# Altium PCB PCB.PcbDoc (part 1 of 2)
Units mm, origin at the board's own origin, x right, y up, seen from the top; angles counter-clockwise.
Board outline 27 x 40 mm, 2 copper layers (Top Layer, Bottom Layer), stack 1.56 mm thick; 47 components, 32 nets, 150 pads, 52 vias.
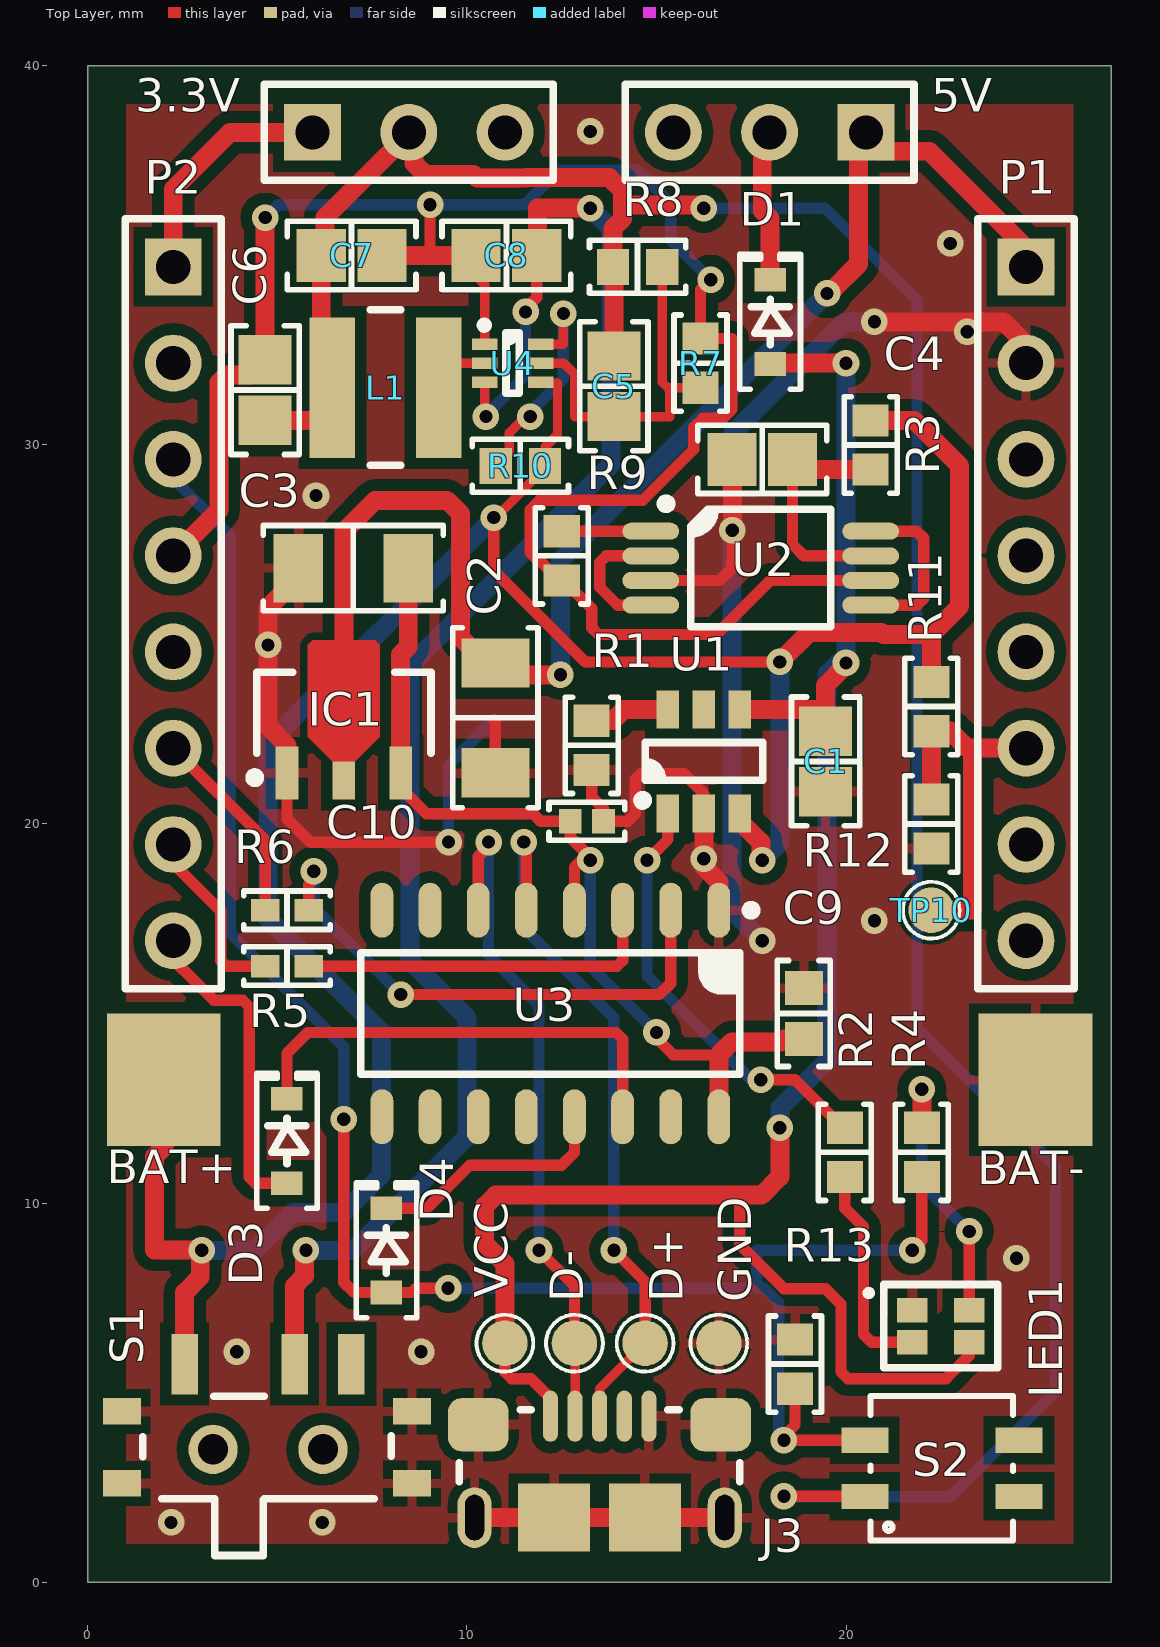
[diagram p0: Top Layer view]
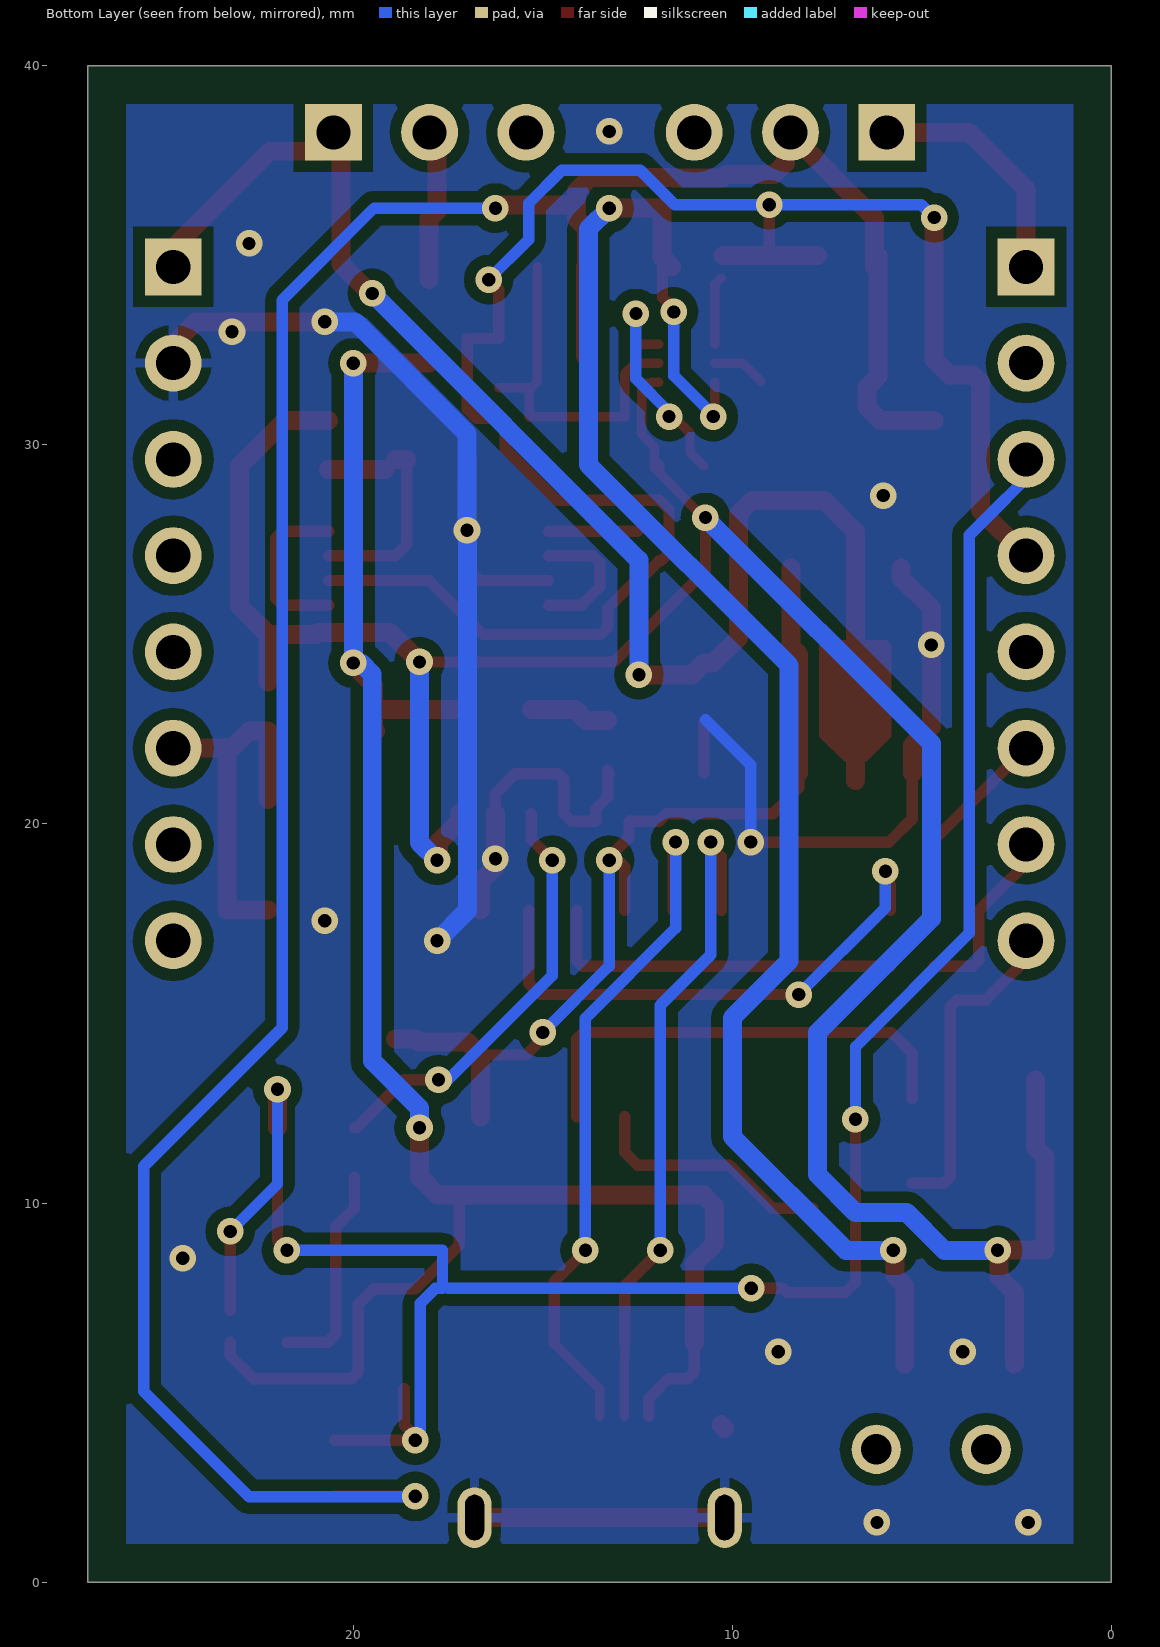
[diagram p1: Bottom Layer view, seen from below]

## Layer stack, top to bottom
Top Solder: solder mask 0.02, Solder Resist, Dk 3.5
Top Layer: signal copper 0.03
Dielectric 1: dielectric 1.5, FR-4, Dk 4.8
Bottom Layer: signal copper 0.03
Bottom Solder: solder mask 0.02, Solder Resist, Dk 3.5

## Board outline
0,0 27,0 27,40 0,40

## Design rules (kind name [scope] priority, off if disabled: settings)
AcuteAngle [All] p1: minimum=6.00000000000000E+0001 checktracksonly=TRUE
AssemblyTestPointUsage [(not InNetClass('NOTESTPOINTS'))] p1: allowmultiple=TRUE
AssemblyTestPointUsage AssemblyTestPointUsageN [InNetClass('NOTESTPOINTS')] p2: valid=2 allowmultiple=TRUE
AssemblyTestpoint [All] p1: testpointundercomponent=TRUE minsize=0.8 maxsize=2 preferedsize=1 minholesize=0 maxholesize=0.35 preferedholesize=0 testpointgrid=1.27 usegrid=FALSE gridoriginx=87.5 gridoriginy=62.5 gridtolerance=0 allowsidetop=TRUE minspacing=2.54 // Zollner
BoardOutlineClearance BoardCopperOutlineClearance [(OnLayer('Top Layer') OR OnLayer('Bottom Layer') )] p1: gap=0.5 ignorepadtopadclearanceinfootprint=FALSE except(1: Poly-OutlineEdge Region-OutlineEdge; 1.5: SMDPad-OutlineEdge THPad-OutlineEdge)
Clearance PadToViaClearance [IsVia and not IsComponentVia vs IsPad] p1: gap=0.025 ignorepadtopadclearanceinfootprint=TRUE
Clearance "Clearance NOTSELV-SELV" [InNetClass('NOTSELV') vs NOT InNetClass('NOTSELV')] p2: gap=6 ignorepadtopadclearanceinfootprint=FALSE // according to previous calio PCB
Clearance "Clearance (FAB)" [All] p3: gap=0.203 ignorepadtopadclearanceinfootprint=TRUE except(0.305: Arc-Poly Track-Poly SMDPad-Poly THPad-Poly Via-Poly Fill-Poly Poly-Poly)
ComponentClearance ComponentClearance_NetTie [((ObjectKind = 'Component') And (ComponentType = 'Net Tie')) Or (Footprint = 'StarPoint') Or (Footprint like 'NetTieVia*')] p1: gap=-3.81 collisioncheckmode=3 verticalgap=-3.81 showdistances=FALSE
ComponentClearance [All] p2: gap=0.254 collisioncheckmode=3 verticalgap=0.254 showdistances=FALSE
DiffPairsRouting [All] p1: maxlimit=1.27 minlimit=0.203 mostfreqgap=0.203 toplayer_minwidth=0.152 toplayer_maxwidth=2.54 toplayer_prefwidth=0.254 bottomlayer_minwidth=0.152 bottomlayer_maxwidth=2.54 bottomlayer_prefwidth=0.254 maxuncoupledlength=12.7
FabricationTestPointUsage [All] p1: valid=2 allowmultiple=FALSE
FabricationTestpoint [All] p1: side=3 testpointundercomponent=TRUE minsize=1.016 maxsize=2.54 preferedsize=1.524 minholesize=0 maxholesize=1.016 preferedholesize=0.813 testpointgrid=0.025 allowsidetop=TRUE allowsidebottom=TRUE usegrid=FALSE gridtolerance=0
HoleSize [All] p1: absolutevalues=TRUE maxlimit=6.35 minlimit=0.3 maxpercent=80.000 minpercent=20.000 // Zollner
HoleToHoleClearance HoleToHoleClearance_NetTieVia [InPadClass('NetTieVias') vs InPadClass('NetTieVias')] p1: gap=0 allowstackedmicrovias=TRUE
HoleToHoleClearance [All] p2: gap=0.25 allowstackedmicrovias=TRUE // Zollner
MinimumAnnularRing [All] p1: minimumring=0.15 // PCBWAY
MinimumSolderMaskSliver [All] p1: minsoldermaskwidth=0.2 // Zollner
PlaneClearance PlaneClearance_1 [All] p1: clearance=0.508
PlaneConnect [All] p1: pad.planeconnectstyle=Relief pad.reliefexpansion=0.508 pad.reliefentries=4 pad.reliefconductorwidth=0.254 pad.reliefairgap=0.254 via.planeconnectstyle=Direct via.reliefexpansion=0.508 via.reliefentries=4 via.reliefconductorwidth=0.254 via.reliefairgap=0.254
PolygonConnect [All] p1: thpad.connectstyle=Relief thpad.reliefconductorwidth=0.254 thpad.reliefentries=4 thpad.polygonreliefangle="90 Angle" thpad.airgapwidth=0.254 smdpad.connectstyle=Relief smdpad.reliefconductorwidth=0.254 smdpad.reliefentries=4 smdpad.polygonreliefangle="90 Angle" smdpad.airgapwidth=0.254 via.connectstyle=Direct via.reliefconductorwidth=0.254 via.reliefentries=4 via.polygonreliefangle="90 Angle" via.airgapwidth=0.254
RoutingVias [All] p1: holewidth=0.35 width=0.7 viastyle="Through Hole" minholewidth=0.3 minwidth=0.6 maxholewidth=1.27 maxwidth=1.27
SMDEntry [not IsTestpoint] p1: side=TRUE corner=TRUE anyangle=FALSE
SMDNeckDown [not IsTestpoint] p1: percent=90.000
SMDToCorner [All] p1: distance=10000
SMDToPlane [All] p1: distance=0
ShortCircuit [All vs not IsBoardCutoutRegion] p1: allowed=FALSE
SilkToSolderMaskClearance [IsPad] p1: minsilkscreentomaskgap=0.127 clearancetoexposedcopper=TRUE
SolderMaskExpansion [All] p1: expansion=0.05 // Zollner
SolderMaskExpansion SolderMaskExpansionToHoles [All] p2: expansion=0.1 soldermaskfromhole=TRUE // Zollner
UnRoutedNet [All] p1: checkbadconnections=TRUE
Width [All] p1: maxlimit=12.7 minlimit=0.203 preferedwidth=0.254
16 further rules are at their usual default settings.

## Classes and differential pairs
component class main: BAT+ BAT- C1 C2 C3 C4 C5 C6 C7 C8 C9 C10 D1 D3 D4 D+ D- GND IC1 J3 L1 P1 P2 R1 R2 R3 R4 R5 R6 R7 R8 R9 R10 R11 R12 S1 S2 U1 U2 U3 U4 VCC

## Components (designator, comment, footprint, x,y, rotation, side; value= is the part's Value field where it differs from the comment)
3.3V "Header 3" HDR1X3 5.925,38.25 r0 top (schematic designator P3)
5V "Header 3" HDR1X3 20.525,38.25 r180 top (schematic designator P4)
BAT+ "3MMx3.5MM" PAD_WITHOUT_HOLE_3X3.5MM 2,13.25 r0 top
BAT- "3MMx3.5MM" PAD_WITHOUT_HOLE_3X3.5MM 25,13.25 r0 top
C1 "2.2 µF" "CAP 0805_2012" 19.46,21.65 r90 top
C2 "10 µF" "CAP 1206_3216 - 0.8MM" 10.75,22.8 r90 top
C3 "10 µF" "CAP 1206_3216 - 0.8MM" 7,26.75 r0 top
C4 "0.1 µF" "CAP 0805_2012" 17.79,29.62 r0 top
C5 "120 pF" "CAP 0805_2012" 13.878,31.55 r90 top
C6 "22 µF" "CAP 0805_2012" 4.675,31.45 r270 top
C7 "22 µF" "CAP 0805_2012" 6.955,35 r180 top
C8 "4.7 µF" "CAP 0805_2012" 11.04,35 r0 top
C9 "0.1 µF" "CAP 0603_1608" 18.888,15 r270 top
C10 "120pF" "CAP 0402_1005" 13.164,20.075 r180 top
D1 "1N4148WS-HG3-08" SOD323 18,33.25 r90 top
D3 "1N4148WS-HG3-08" SOD323 5.25,11.638 r90 top
D4 "1N4148WS-HG3-08" SOD323 7.875,8.75 r90 top
D+ "Test point" TEST_POINT 14.7,6.3 r90 top
D- "Test point" TEST_POINT 12.835,6.3 r90 top
GND "Test point" TEST_POINT 16.645,6.3 r90 top
IC1 "Diodes Inc PJ6206A" "ON SEMI SOT-89 H" 6.75,22.75 r90 top
J3 "10118193-0001LF" "FCI USB 10118193-0001LF" 13.5,1.75 r180 top locked
L1 "15 µH" "TAIYO YUDEN NR4018" 7.85,31.514 r180 top
LED1 "Bicolor 1615" "LED 0603 1615 BICOLOR" 22.5,6.75 r0 top
P1 "Header 8" HDR1X8 24.75,34.7 r270 top locked
P2 "Header 8" HDR1X8 2.25,34.7 r270 top locked
R1 "3.9 kOhms" "RES 0603_1608" 13.29,22.075 r90 top
R2 "330 Ohms" "RES 0603_1608" 19.968,11.337 r270 top
R3 "RC1608F101CS" "RES 0603_1608" 20.65,30 r90 top
R4 "330 Ohms" "RES 0603_1608" 22,11.337 r270 top
R5 "RC1005J000CS" "RES 0402_1005" 5.25,16.25 r180 top
R6 "RC1005J000CS" "RES 0402_1005" 5.25,17.725 r180 top
R7 "100 kOhms" "RES 0603_1608" 16.162,32.16 r270 top
R8 "453 kOhms" "RES 0603_1608" 14.5,34.7 r180 top
R9 "RC1608F102CS" "RES 0603_1608" 12.5,27.075 r90 top
R10 "499 kOhms" "RES 0603_1608" 11.408,29.45 r180 top
R11 "100 kOhms" "RES 0603_1608" 22.25,23.1 r90 top
R12 "10 kOhms" "RES 0603_1608" 22.25,20 r90 top
R13 "5 kOhms" "RES 0603_1608" 18.655,5.75 r270 top
S1 "Mini Slide Switch" "MINI SLIDE SWITCH" 4.75,3.5 r180 top
S2 "EVQ-P7A01P" EVQ-P7A01P 22.529,3 r0 top
TP10 "Test point" TEST_POINT 22.25,17.725 r90 top
U1 "TP4057" "TI SOT-23-6 DDC" 16.25,21.65 r90 top
U2 "DW03D" "TI MSOP-8 DGS" 17.75,26.75 r0 top
U3 "CH340G" "TI SOP-16 D" 12.2,15 r270 top
U4 "TPS62A01ADRLR" "TI SOT-563 DRL" 11.205,32.16 r0 top
VCC "Test point" TEST_POINT 11,6.3 r0 top

## Footprints (in the part's own frame and the unit in brackets; to place one, negate y for a bottom-side part, rotate by r counter-clockwise, add the part's x,y. Pads: shape width x height; smd on the part's side, far side on the other; paste and mask are expansions set on the pad)
"CAP 0402_1005" [mm] "Chip Capacitor, 2-Leads, Body 1.02x0.51mm, IPC Medium Density"
  rect 0.6x0.64 smd: 1(-0.44,0) 2(0.44,0)
  silkscreen extent -1,-0.5 1,0.5, body extent -0.5,-0.26 0.5,0.26, height 0.52
"CAP 0603_1608" [mm] "Chip Capacitor, 2-Leads, Body 1.60x0.80mm, IPC Medium Density"
  rect 0.9x1 smd: 1(-0.675,0) 2(0.675,0)
  silkscreen extent -1.4,-0.7 1.4,0.7, body extent -0.8,-0.41 0.8,0.41, height 0.82
"CAP 0805_2012" [mm] "Chip Capacitor, 2-Leads, Body 2.00x1.20mm, IPC Medium Density"
  rect 1.3x1.4 smd: 1(-0.8,0) 2(0.8,0)
  silkscreen extent -1.7,-0.9 1.7,0.9, body extent -1,-0.64 1,0.64, height 1.26
"CAP 1206_3216 - 0.8MM" [mm] "Chip Capacitor, 2-Leads, Body 3.25x1.60mm, IPC Medium Density"
  rect 1.3x1.8 smd: 1(-1.45,0) 2(1.45,0)
  silkscreen extent -2.37,-1.12 2.37,1.12, body extent -1.6,-0.8 1.6,0.8, height 0.8
EVQ-P7A01P [mil]
  rect 49x26 smd paste+0 mask+0: 2(-80,29.13) 2*(80,29.13) 3(-80,-29.13) 3*(80,-29.13)
  silkscreen extent -74,-75 74,75, body extent -93,-83 92,57, height 53
"FCI USB 10118193-0001LF" [mm] "USB 2.0 Type B Micro"
  oval 0.4x1.35 smd: 1(1.3,-2.625) 2(0.65,-2.625) 3(0,-2.625) 4(-0.65,-2.625) 5(-1.3,-2.625)
  oval 0.9x1.6 hole 0.5 slot 1.2 at 90 deg: S(-3.3,0.05) S(3.3,0.05)
  rrect50% 1.6x1.4 smd: S(-3.2,-2.4) S(3.2,-2.4)
  rect 1.9x1.8 smd: S(-1.2,0.05) S(1.2,0.05)
  silkscreen extent -3.7,-2.8 3.7,-0.9, body extent -3.93,-2.9 3.93,2.76, height 2.78
HDR1X3 [mm] "Connector; Header; 3 Position"
  rect 1.5x1.5 hole 0.9: 1(0,0)
  round 1.5 hole 0.9: 2(2.54,0) 3(5.08,0)
  silkscreen extent -1.27,-1.27 6.35,1.27
HDR1X8 [mm] "Connector; Header; 8 Position"
  rect 1.5x1.5 hole 0.9: 1(0,0)
  round 1.5 hole 0.9: 2(2.54,0) 3(5.08,0) 4(7.62,0) 5(10.16,0) 6(12.7,0) 7(15.24,0) 8(17.78,0)
  silkscreen extent -1.27,-1.27 19.05,1.27
"LED 0603 1615 BICOLOR" [mm] "SMD SMT Light Emitting Diode 1.6*0.8*0.6MM"
  rect 0.8x0.65 smd mask+0.05: 1(-0.75,0.425) 2(0.75,0.425) 3(-0.75,-0.425) 4(0.75,-0.425)
  silkscreen extent -1.94,-1.1 1.5,1.1
"MINI SLIDE SWITCH" [mm] "Miniature Horizontal Slide Switch SMD"
  rect 0.7x1.6 smd: 1(2.2,-2.25) 2(-0.7,-2.25) 3(-2.2,-2.25)
  rect 1x0.7 smd: 4(-3.8,-1) 4(-3.8,0.9) 4(3.85,-1) 4(3.85,0.9)
  round 1.3 hole 0.8: MH(-1.45,0) MH(1.45,0)
  silkscreen extent -3.25,-1.4 3.3,2.8, body extent -3.25,-1.4 6.5,2.8, height 1.4
"ON SEMI SOT-89 H" [mm] "SOT89, 3-Leads, Body 4.50x2.50mm, Pitch 1.50mm, Lead Span 3.3mm, IPC Medium Density"
  rect 1.4x0.6 smd: 1(-1.4,1.5) 3(-1.4,-1.5)
  rect 1x0.6 smd: 2(-1.6,0)
  Top Layer region: -1.1,0.3 -0.45,0.95 1.975,0.95 2.1,0.825 2.1,-0.825 1.975,-0.95 -0.45,-0.95 -1.1,-0.3
  silkscreen extent -1.65,-2.3 1.25,2.47, body extent -2.05,-2.25 2.1,2.25, height 1.5
PAD_WITHOUT_HOLE_3X3.5MM [mm]
  rect 3x3.5 smd: 1(0,0)
"RES 0402_1005" [mm] "Chip Resistor, 2-Leads, Body 1.0x0.5mm, IPC Medium Density"
  rect 0.75x0.6 smd: 1(-0.575,0) 2(0.575,0)
  silkscreen extent -1.14,-0.51 1.14,0.51, body extent -0.5,-0.25 0.5,0.25, height 0.35
"RES 0603_1608" [mm] "Chip Resistor, 2-Leads, Body 1.60x0.80mm, IPC Medium Density"
  rect 0.85x0.95 smd: 1(-0.65,0) 2(0.65,0)
  silkscreen extent -1.27,-0.7 1.27,0.7, body extent -0.8,-0.4 0.8,0.4, height 0.45
SOD323 [mm] "SOD, 2-Leads, Body 1.25x2.50mm, IPC Medium Density"
  rect 0.625x0.83 smd: 1(-1.112,0) 2(1.112,0)
  silkscreen extent -1.78,-0.8 1.78,0.8, body extent -1.36,-0.62 1.36,0.62, height 1.05
"TAIYO YUDEN NR4018" [mm] "Power Inductor, 2-Leads,Taiyo Yuden, NR4018T100M"
  rect 1.2x3.7 smd: 1(-1.4,0) 2(1.4,0)
  silkscreen extent -0.4,-2.05 0.4,2.05, body extent -2.05,-2.05 2.05,2.05, height 1.8
TEST_POINT [mm] "Reference point"
  round 1.2 smd paste-0.6: TP?(0,0)
  silkscreen extent -0.75,-0.75 0.75,0.75, body extent -0.6,-0.6 0.6,0.6, height 0.03
"TI MSOP-8 DGS" [mm] "MSOP, 8-Leads, Body 3.00x4.40mm, Pitch 0.65mm, IPC Medium Density"
  oval 1.5x0.45 smd: 1(-2.9,0.975) 2(-2.9,0.325) 3(-2.9,-0.325) 4(-2.9,-0.975) 5(2.9,-0.975) 6(2.9,-0.325) 7(2.9,0.325) 8(2.9,0.975)
  silkscreen extent -2.62,-1.55 1.85,1.82, body extent -3.2,-1.55 3.2,1.55, height 1.2
"TI SOP-16 D" [mm] "SOP, 16-Leads, Body 9.90x3.90mm, Pitch 1.27mm, IPC Medium Density"
  oval 1.45x0.6 smd: 1(-2.725,4.445) 2(-2.725,3.175) 3(-2.725,1.905) 4(-2.725,0.635) 5(-2.725,-0.635) 6(-2.725,-1.905) 7(-2.725,-3.175) 8(-2.725,-4.445) 9(2.725,-4.445) 10(2.725,-3.175) 11(2.725,-1.905) 12(2.725,-0.635) 13(2.725,0.635) 14(2.725,1.905) 15(2.725,3.175) 16(2.725,4.445)
  silkscreen extent -2.85,-5 1.6,5.42, body extent -3,-5 3,5, height 1.75
"TI SOT-23-6 DDC" [mm] "SOT23, 6-Leads, Body 2.90x2.80mm, Pitch 0.95mm, IPC Medium Density"
  rect 1x0.6 smd: 1(-1.375,0.95) 2(-1.375,0) 3(-1.375,-0.95) 4(1.375,-0.95) 5(1.375,0) 6(1.375,0.95)
  silkscreen extent -1.15,-1.55 0.5,1.74, body extent -1.19,-1.45 1.19,1.45, height 1
"TI SOT-563 DRL" [mm] "SOT DRL, 6-Leads, Body 1.10x1.60mm, Pitch 0.5mm, IPC Medium Density"
  rect 0.67x0.3 smd mask+0.07: 1(-0.74,0.5) 2(-0.74,0) 3(-0.74,-0.5) 4(0.74,-0.5) 5(0.74,0) 6(0.74,0.5)
  silkscreen extent -0.85,-0.8 0.18,1.1, body extent -0.8,-0.8 0.8,0.8, height 0.6

## Part data
3.3V 5V: "Header, 3-Pin", LatestRevisionDate=17-Jul-2002, LatestRevisionNote="Re-released for DXP Platform.", Publisher="Altium Limited"
BAT+ BAT-: library part PAD_WITHOUT_HOLE_3X3.5MM, "High: 3mm Length: 3.5mm"
C1: library part CL21B225KAFNNNG, "CAP CER 2.2UF 25V X7R 0805", Device Package="0805 (2012 Metric)", manufacturer="Samsung Electro-Mechanics", Operating Temperature="-55°C ~ 125°C", Supplier Part Number 1=CL21B225KAFNNNG-ND, Temperature Coefficient=X7R, Tolerance=±10%, Voltage - Rated=25V, Applications="General Purpose", Capacitance="2.2 µF", componentlink1description=Datasheet, componentlink1url=https://www.samsungsem.com/kr/support/product-search/mlcc/CL21B225KAFNNNG.jsp, componentlink2description="DigiKey Link", componentlink2url=https://www.digikey.com/en/products/detail/samsung-electro-mechanics/CL21B225KAFNNNG/3894505, id=7786, lastupdated=2023-01-24T21:37:16.427, Lifecycle Status=Active, Minimum Order=3000, Mounting Type="Surface Mount, MLCC", Package / Case="0805 (2012 Metric)", packaging=TapeAndReel, partid=47423, Part Number=CL21B225KAFNNNG, Part Status=Active, price=0.02, series=CL, Size / Dimension="0.079\" L x 0.049\" W (2.00mm x 1.25mm)", Supplier 1=DigiKey, Thickness (Max)="0.053\" (1.35mm)"
C2 C3: library part CL31X106KAHNNNE, "CAP CER 10UF 25V X6S 1206", Device Package="1206 (3216 Metric)", manufacturer="Samsung Electro-Mechanics", Operating Temperature="-55°C ~ 105°C", Supplier Part Number 1=1276-3298-1-ND, Temperature Coefficient=X6S, Tolerance=±10%, Voltage - Rated=25V, Applications="General Purpose", Capacitance="10 µF", componentlink1description=Datasheet, componentlink1url=http://www.samsungsem.com/kr/support/product-search/mlcc/CL31X106KAHNNNE.jsp, componentlink2description="DigiKey Link", componentlink2url=https://www.digikey.com/en/products/detail/samsung-electro-mechanics/CL31X106KAHNNNE/3888956, id=887, lastupdated=2023-01-03T20:13:11.600, Lifecycle Status=Active, Minimum Order=1, Mounting Type="Surface Mount, MLCC", Package / Case="1206 (3216 Metric)", packaging=TapeAndReel, partid=20108, Part Number=CL31X106KAHNNNE, Part Status=Active, price=0.06, series=CL, Size / Dimension="0.126\" L x 0.063\" W (3.20mm x 1.60mm)", Supplier 1=DigiKey, Thickness (Max)="0.071\" (1.80mm)"
C4: library part CL21B104MACNNNC, "CAP CER 0.1UF 25V X7R 0805", Device Package="0805 (2012 Metric)", manufacturer="Samsung Electro-Mechanics", Operating Temperature="-55°C ~ 125°C", Supplier Part Number 1=1276-2449-1-ND, Temperature Coefficient=X7R, Tolerance=±20%, Voltage - Rated=25V, Applications="General Purpose", Capacitance="0.1 µF", componentlink1description=Datasheet, componentlink1url=http://www.samsungsem.com/kr/support/product-search/mlcc/CL21B104MACNNNC.jsp, componentlink2description="DigiKey Link", componentlink2url=https://www.digikey.com/en/products/detail/samsung-electro-mechanics/CL21B104MACNNNC/3888107, id=7656, lastupdated=2023-01-03T20:10:14.260, Lifecycle Status=Active, Minimum Order=1, Mounting Type="Surface Mount, MLCC", Package / Case="0805 (2012 Metric)", packaging=TapeAndReel, partid=46521, Part Number=CL21B104MACNNNC, Part Status=Active, price=0.01, series=CL, Size / Dimension="0.079\" L x 0.049\" W (2.00mm x 1.25mm)", Supplier 1=DigiKey, Thickness (Max)="0.037\" (0.95mm)"
C5: library part CL21C121JB61PNC, "CAP CER 120PF 50V C0G/NP0 0805", Device Package="0805 (2012 Metric)", manufacturer="Samsung Electro-Mechanics", Operating Temperature="-55°C ~ 125°C", Ratings=AEC-Q200, Supplier Part Number 1=1276-2581-1-ND, Temperature Coefficient="C0G, NP0", Tolerance=±5%, Voltage - Rated=50V, Applications=Automotive, Capacitance="120 pF", componentlink1description=Datasheet, componentlink1url=http://www.samsungsem.com/kr/support/product-search/mlcc/CL21C121JB61PNC.jsp, componentlink2description="DigiKey Link", componentlink2url=https://www.digikey.com/en/products/detail/samsung-electro-mechanics/CL21C121JB61PNC/3888239, id=3404, lastupdated=2023-01-03T20:10:16, Lifecycle Status=Active, Minimum Order=1, Mounting Type="Surface Mount, MLCC", Package / Case="0805 (2012 Metric)", packaging=TapeAndReel, partid=17197, Part Number=CL21C121JB61PNC, Part Status=Active, price=0.01, series=CL, Size / Dimension="0.079\" L x 0.049\" W (2.00mm x 1.25mm)", Supplier 1=DigiKey, Thickness (Max)="0.028\" (0.70mm)"
C6 C7: library part CL21Z226MQYVPNE, "CAP CER 22UF 6.3V X7T 0805", Device Package="0805 (2012 Metric)", manufacturer="Samsung Electro-Mechanics", Operating Temperature="-55°C ~ 125°C", Ratings=AEC-Q200, Supplier Part Number 1=1276-CL21Z226MQYVPNECT-ND, Temperature Coefficient=X7T, Tolerance=±20%, Voltage - Rated=6.3V, Applications=Automotive, Capacitance="22 µF", componentlink2description="DigiKey Link", componentlink2url=https://www.digikey.com/en/products/detail/samsung-electro-mechanics/CL21Z226MQYVPNE/16572839, id=7377, lastupdated=2023-01-03T20:09:49.500, Lifecycle Status=Active, Minimum Order=1, Mounting Type="Surface Mount, MLCC", Package / Case="0805 (2012 Metric)", packaging=TapeAndReel, partid=45603, Part Number=CL21Z226MQYVPNE, Part Status=Active, price=0.10, series=CL, Size / Dimension="0.079\" L x 0.049\" W (2.00mm x 1.25mm)", Supplier 1=DigiKey, Thickness (Max)="0.057\" (1.45mm)"
C8: library part CL21Y475KBBVPNE, "CAP CER 4.7UF 50V X7S 0805", Device Package="0805 (2012 Metric)", manufacturer="Samsung Electro-Mechanics", Operating Temperature="-55°C ~ 125°C", Ratings=AEC-Q200, Supplier Part Number 1=1276-CL21Y475KBBVPNECT-ND, Temperature Coefficient=X7S, Tolerance=±10%, Voltage - Rated=50V, Applications=Automotive, Capacitance="4.7 µF", componentlink1description=Datasheet, componentlink1url=https://weblib.samsungsem.com/mlcc/mlcc-ec-data-sheet.do?partNumber=CL21Y475KBBVPN, componentlink2description="DigiKey Link", componentlink2url=https://www.digikey.com/en/products/detail/samsung-electro-mechanics/CL21Y475KBBVPNE/14565391, id=9682, lastupdated=2023-08-01T19:09:03.393, Lifecycle Status=Active, Minimum Order=1, Mounting Type="Surface Mount, MLCC", Package / Case="0805 (2012 Metric)", packaging=TapeAndReel, partid=55785, Part Number=CL21Y475KBBVPNE, price=0.14, series=CL, Size / Dimension="0.079\" L x 0.049\" W (2.00mm x 1.25mm)", Supplier 1=DigiKey, Thickness (Max)="0.059\" (1.50mm)"
C9: library part CL10B104KB8NNNL, "CAP CER 0.1UF 50V X7R 0603", Device Package="0603 (1608 Metric)", manufacturer="Samsung Electro-Mechanics", Operating Temperature="-55°C ~ 125°C", Supplier Part Number 1=1276-CL10B104KB8NNNLCT-ND, Temperature Coefficient=X7R, Tolerance=±10%, Voltage - Rated=50V, Applications="General Purpose", Capacitance="0.1 µF", componentlink1description=Datasheet, componentlink1url=http://www.samsungsem.com/kr/support/product-search/mlcc/CL10B104KB8NNNL.jsp, componentlink2description="DigiKey Link", componentlink2url=https://www.digikey.com/en/products/detail/samsung-electro-mechanics/CL10B104KB8NNNL/3894274, id=350, lastupdated=2023-01-03T20:07:44.840, Lifecycle Status=Active, Minimum Order=1, Mounting Type="Surface Mount, MLCC", Package / Case="0603 (1608 Metric)", packaging=CutTape, partid=3517, Part Number=CL10B104KB8NNNL, Part Status=Active, price=0.01, series=CL, Size / Dimension="0.063\" L x 0.031\" W (1.60mm x 0.80mm)", Supplier 1=DigiKey, Thickness (Max)="0.035\" (0.90mm)"
C10: library part 04023A121JAT2A, "CAP CER 120PF 25V NP0 0402", Device Package="0402 (1005 Metric)", manufacturer="AVX Corporation", Operating Temperature="-55°C ~ 125°C", Supplier Part Number 1=478-11356-1-ND, Temperature Coefficient="C0G, NP0", Tolerance=±5%, Voltage - Rated=25V, Applications="General Purpose", Capacitance=120pF, componentlink1description=Datasheet, componentlink1url=http://datasheets.avx.com/C0GNP0-Dielectric.pdf, componentlink2description="DigiKey Link", componentlink2url=http://digikey.com/product-detail/en/avx-corporation/04023A121JAT2A/478-11356-1-ND/8019109, id=1520, lastupdated=2022-02-08T12:26:51.233, Lifecycle Status=Active, Minimum Order=1, Mounting Type="Surface Mount, MLCC", Package / Case="0402 (1005 Metric)", packaging=TapeAndReel, partid=6216, Part Number=04023A121JAT2A, Part Status=Active, price=0.01, series=-, Size / Dimension="0.039\" L x 0.020\" W (1.00mm x 0.50mm)", Supplier 1=DigiKey, Thickness (Max)="0.022\" (0.56mm)"
D1 D3 D4: "SWITCHING DIODE GENPURP SOD323-H", Current - Average Rectified (Io)=150mA, Current - Reverse Leakage @ Vr="100µA @ 100V", manufacturer="Vishay Semiconductor Diodes Division", Operating Temperature - Junction="-55°C ~ 150°C", Package / Case="SC-76, SOD-323", Supplier Device Package=SOD-323, Supplier Part Number 1=1N4148WS-HG3-08GICT-ND, Voltage - Dc Reverse (Vr) (Max)=100V, Voltage - Forward (Vf) (Max) @ If="1.2V @ 100mA", componentlink1description=Datasheet, componentlink1url=http://www.vishay.com/docs/85413/1n4148wsg.pdf, componentlink2description="DigiKey Link", componentlink2url=http://digikey.com/product-detail/en/vishay-semiconductor-diodes-division/1N4148WS-HG3-08/1N4148WS-HG3-08GICT-ND/9467498, Diode Type=Standard, id=2893, lastupdated=2023-01-02T21:07:51.313, Lifecycle Status=Active, Minimum Order=1, Mounting Type="Surface Mount", packaging=TapeAndReel, partid=2893, Part Number=1N4148WS-HG3-08, Part Status=Active, price=0.06, Reverse Recovery Time (Trr)=4ns, series="Automotive, AEC-Q101", Speed="Small Signal =< 200mA (Io), Any Speed", Supplier 1=DigiKey
D+ D- GND TP10 VCC: library part TEST_POIN
IC1: library part PJ6206A, "300mA Low quiescent current fast transient low drop out linear regulator"
J3: "CONN RCPT USB2.0 MICRO B SMD R/A", Current Rating (Amps)="1.8A per Contact", manufacturer="Amphenol ICC (FCI)", Operating Temperature="-30°C ~ 80°C", Supplier Part Number 1=609-4616-2-ND, Voltage - Rated=100VAC, componentlink1description=Datasheet, componentlink1url=https://cdn.amphenol-icc.com/media/wysiwyg/files/documentation/datasheet/inputoutput/io_usb_micro.pdf, componentlink2description="DigiKey Link", componentlink2url=//digikey.com/product-detail/en/amphenol-icc-fci/10118193-0001LF/609-4616-2-ND/2785388, Connector Type="USB - micro B", Features="Solder Retention", Gender=Receptacle, id=4, lastupdated=2019-12-09T20:51:28.143, Lifecycle Status=0, Mating Cycles=10000, Minimum Order=1, Mounting Feature=Horizontal, Mounting Type="Surface Mount, Right Angle; Through Hole", Number Of Contacts=5, Number Of Ports=1, packaging=TapeAndReel, Part Number=10118193-0001LF, Part Status=Active, price=0.21, series=-, Shielding=Shielded, Specifications="USB 2.0", Supplier 1=DigiKey, Termination=Solder
L1: library part NR4018T150M, "FIXED IND 15UH 650MA 300MOHM SMD", Current Rating (Amps)="650 mA", DC Resistance (DCR)="300mOhm Max", Frequency - Self Resonant=19MHz, Inductance Frequency - Test="100 kHz", manufacturer="Taiyo Yuden", Operating Temperature="-25°C ~ 120°C", Supplier Part Number 1=587-NR4018T150MCT-ND, Tolerance=±20%, componentlink1description=Datasheet, componentlink1url=https://www.yuden.co.jp/productdata/catalog/wound04_e.pdf, componentlink2description="DigiKey Link", componentlink2url=https://www.digikey.com/en/products/detail/taiyo-yuden/NR4018T150M/1171820, Height - Seated (Max)="0.071\" (1.80mm)", id=3749, Inductance="15 µH", lastupdated=2023-01-02T21:11:24.473, Lifecycle Status=Active, Material - Core=Ferrite, Minimum Order=1, Mounting Type="Surface Mount", packaging=TapeAndReel, partid=3777, Part Number=NR4018T150M, Part Status=Active, price=0.13, series=NR, Shielding=Shielded, Size / Dimension="0.157\" L x 0.157\" W (4.00mm x 4.00mm)", Supplier 1=DigiKey, Type="Drum Core, Wirewound"
LED1: library part "LED 0603 1615", "SMD SMT Light Emitting Diode 1.6*0.8*0.6MM", componentlink1description=Aliexpress, componentlink1url=https://www.aliexpress.com/item/4001174921701.html?spm=a2g0o.order_list.0.0.12d31802vfu5Sp
P1 P2: "Header, 8-Pin", LatestRevisionDate=17-Jul-2002, LatestRevisionNote="Re-released for DXP Platform.", Publisher="Altium Limited"
R1: library part ERA-3AEB392V, "RES SMD 3.9K OHM 0.1% 1/10W 0603", Device Package="0603 (1608 Metric)", manufacturer="Panasonic Electronic Components", Operating Temperature="-55°C ~ 155°C", Power (Watts)="0.1W, 1/10W", Ratings=AEC-Q200, Supplier Device Package=0603, Supplier Part Number 1=P3.9KDBCT-ND, Temperature Coefficient=±25ppm/°C, Tolerance=±0.1%, componentlink1description=Datasheet, componentlink1url=https://industrial.panasonic.com/cdbs/www-data/pdf/RDM0000/AOA0000C307.pdf, componentlink2description="DigiKey Link", componentlink2url=http://digikey.com/product-detail/en/panasonic-electronic-components/ERA-3AEB392V/P3.9KDBCT-ND/1466066, Composition="Thin Film", Features="Automotive AEC-Q200", Height - Seated (Max)="0.022\" (0.55mm)", id=317, lastupdated=2023-01-02T20:30:24.363, Lifecycle Status=Active, Minimum Order=1, Number of Terminations=2, Package / Case="0603 (1608 Metric)", packaging=TapeAndReel, partid=5539, Part Number=ERA-3AEB392V, Part Status=Active, price=0.04, Resistance="3.9 kOhms", series=ERA-3A, Size / Dimension="0.063\" L x 0.031\" W (1.60mm x 0.80mm)", Supplier 1=DigiKey
R2 R4: library part CRCW0603330RFKEBC, "RES 330 OHM 1% 1/10W 0603", Device Package="0603 (1608 Metric)", manufacturer="Vishay Dale", Operating Temperature="-55°C ~ 155°C", Power (Watts)="0.1W, 1/10W", Supplier Device Package=0603, Supplier Part Number 1=541-CRCW0603330RFKEBCCT-ND, Temperature Coefficient=±100ppm/°C, Tolerance=±1%, componentlink1description=Datasheet, componentlink1url=https://www.vishay.com/docs/28773/crcwce3.pdf, componentlink2description="DigiKey Link", componentlink2url=https://www.digikey.com/en/products/detail/vishay-dale/CRCW0603330RFKEBC/7925041, Composition="Thick Film", Height - Seated (Max)="0.022\" (0.55mm)", id=16336, lastupdated=2023-01-02T20:28:01.787, Lifecycle Status=Active, Minimum Order=1, Number of Terminations=2, Package / Case="0603 (1608 Metric)", packaging=CutTape, partid=65781, Part Number=CRCW0603330RFKEBC, Part Status=Active, price=0.01, Resistance="330 Ohms", series=CRCW-C, Size / Dimension="0.063\" L x 0.031\" W (1.60mm x 0.80mm)", Supplier 1=DigiKey
R3: "RES SMD 100 OHM 1% 1/10W 0603", Device Package="0603 (1608 Metric)", manufacturer="Samsung Electro-Mechanics", Operating Temperature="-55°C ~ 155°C", Power (Watts)="0.1W, 1/10W", Resistance="100 Ohms", Supplier Device Package=0603, Supplier Part Number 1=1276-3482-1-ND, Temperature Coefficient=±100ppm/°C, Tolerance=±1%, componentlink1description=Datasheet, componentlink1url=http://www.samsungsem.com/kr/support/product-search/chip-resistor/__icsFiles/afieldfile/2019/01/21/RC_Spec_Sheet(1901).pdf, componentlink2description="DigiKey Link", componentlink2url=https://www.digikey.com/en/products/detail/samsung-electro-mechanics/RC1608F101CS/3903490, Composition="Thick Film", Features="Moisture Resistant", Height - Seated (Max)="0.022\" (0.55mm)", id=16509, lastupdated=2023-01-02T20:28:25.673, Lifecycle Status=Active, Minimum Order=1, Number of Terminations=2, Package / Case="0603 (1608 Metric)", packaging=TapeAndReel, partid=66903, Part Number=RC1608F101CS, Part Status=Active, price=0.01, series=RC, Size / Dimension="0.063\" L x 0.031\" W (1.60mm x 0.80mm)", Supplier 1=DigiKey
R5 R6: "RES SMD 0 OHM JUMPER 1/16W 0402", Device Package="0402 (1005 Metric)", manufacturer="Samsung Electro-Mechanics", Operating Temperature="-55°C ~ 155°C", Power (Watts)="0.063W, 1/16W", Resistance="0 Ohms", Supplier Device Package=0402, Supplier Part Number 1=1276-3480-1-ND, Tolerance=Jumper, componentlink1description=Datasheet, componentlink1url=http://www.samsungsem.com/kr/support/product-search/chip-resistor/__icsFiles/afieldfile/2019/01/21/RC_Spec_Sheet(1901).pdf, componentlink2description="DigiKey Link", componentlink2url=https://www.digikey.com/en/products/detail/samsung-electro-mechanics/RC1005J000CS/3903488, Composition="Thick Film", Features="Moisture Resistant", Height - Seated (Max)="0.016\" (0.40mm)", id=12475, lastupdated=2023-01-02T20:20:21.623, Lifecycle Status=Active, Minimum Order=1, Number of Terminations=2, Package / Case="0402 (1005 Metric)", packaging=CutTape, partid=66881, Part Number=RC1005J000CS, Part Status=Active, price=0.01, series=RC, Size / Dimension="0.039\" L x 0.020\" W (1.00mm x 0.50mm)", Supplier 1=DigiKey
R7: library part PATT0603E1003BGT1, "RES SMD 100K OHM 0.1% 0.15W 0603", Device Package="0603 (1608 Metric)", manufacturer="Vishay Thin Film", Operating Temperature="-55°C ~ 250°C", Power (Watts)=0.15W, Ratings=AEC-Q200, Supplier Device Package=0603, Supplier Part Number 1=764-1032-1-ND, Temperature Coefficient=±25ppm/°C, Tolerance=±0.1%, componentlink1description=Datasheet, componentlink1url=http://www.vishay.com/docs/60124/patt.pdf, componentlink2description="DigiKey Link", componentlink2url=http://digikey.com/product-detail/en/vishay-thin-film/PATT0603E1003BGT1/764-1032-1-ND/4307856, Composition="Thin Film", Features="Anti-Sulfur, Automotive AEC-Q200, Moisture Resistant", Height - Seated (Max)="0.018\" (0.46mm)", id=6741, lastupdated=2023-01-02T20:29:29.720, Lifecycle Status=Active, Minimum Order=1, Number of Terminations=2, Package / Case="0603 (1608 Metric)", packaging=TapeAndReel, partid=18674, Part Number=PATT0603E1003BGT1, Part Status=Active, price=0.44, Resistance="100 kOhms", series=PATT, Size / Dimension="0.064\" L x 0.032\" W (1.63mm x 0.81mm)", Supplier 1=DigiKey
R8: library part CRCW0603453KFKEAC, "RES 453K OHM 1% 1/10W 0603", Device Package="0603 (1608 Metric)", manufacturer="Vishay Dale", Operating Temperature="-55°C ~ 155°C", Power (Watts)="0.1W, 1/10W", Supplier Device Package=0603, Supplier Part Number 1=541-CRCW0603453KFKEACCT-ND, Temperature Coefficient=±100ppm/°C, Tolerance=±1%, componentlink1description=Datasheet, componentlink1url=https://www.vishay.com/docs/28773/crcwce3.pdf, componentlink2description="DigiKey Link", componentlink2url=https://www.digikey.com/en/products/detail/vishay-dale/CRCW0603453KFKEAC/7924474, Composition="Thick Film", Height - Seated (Max)="0.022\" (0.55mm)", id=16356, lastupdated=2023-01-02T20:28:01.953, Lifecycle Status=Active, Minimum Order=1, Number of Terminations=2, Package / Case="0603 (1608 Metric)", packaging=CutTape, partid=65801, Part Number=CRCW0603453KFKEAC, Part Status=Active, price=0.01, Resistance="453 kOhms", series=CRCW-C, Size / Dimension="0.063\" L x 0.031\" W (1.60mm x 0.80mm)", Supplier 1=DigiKey
R9: "RES SMD 1K OHM 1% 1/10W 0603", Device Package="0603 (1608 Metric)", manufacturer="Samsung Electro-Mechanics", Operating Temperature="-55°C ~ 155°C", Power (Watts)="0.1W, 1/10W", Resistance="1 kOhms", Supplier Device Package=0603, Supplier Part Number 1=1276-3484-1-ND, Temperature Coefficient=±100ppm/°C, Tolerance=±1%, componentlink1description=Datasheet, componentlink1url=http://www.samsungsem.com/kr/support/product-search/chip-resistor/__icsFiles/afieldfile/2019/01/21/RC_Spec_Sheet(1901).pdf, componentlink2description="DigiKey Link", componentlink2url=https://www.digikey.com/en/products/detail/samsung-electro-mechanics/RC1608F102CS/3903492, Composition="Thick Film", Features="Moisture Resistant", Height - Seated (Max)="0.022\" (0.55mm)", id=16510, lastupdated=2023-01-02T20:28:25.683, Lifecycle Status=Active, Minimum Order=1, Number of Terminations=2, Package / Case="0603 (1608 Metric)", packaging=TapeAndReel, partid=66904, Part Number=RC1608F102CS, Part Status=Active, price=0.01, series=RC, Size / Dimension="0.063\" L x 0.031\" W (1.60mm x 0.80mm)", Supplier 1=DigiKey
R10: library part CRCW0603499KFKEAC, "RES 499K OHM 1% 1/10W 0603", Device Package="0603 (1608 Metric)", manufacturer="Vishay Dale", Operating Temperature="-55°C ~ 155°C", Power (Watts)="0.1W, 1/10W", Supplier Device Package=0603, Supplier Part Number 1=541-5445-1-ND, Temperature Coefficient=±100ppm/°C, Tolerance=±1%, componentlink1description=Datasheet, componentlink1url=https://www.vishay.com/docs/28773/crcwce3.pdf, componentlink2description="DigiKey Link", componentlink2url=https://www.digikey.com/en/products/detail/vishay-dale/CRCW0603499KFKEAC/7924019, Composition="Thick Film", Height - Seated (Max)="0.022\" (0.55mm)", id=16312, lastupdated=2023-01-02T20:28:01.577, Lifecycle Status=Active, Minimum Order=1, Number of Terminations=2, Package / Case="0603 (1608 Metric)", packaging=CutTape, partid=65757, Part Number=CRCW0603499KFKEAC, Part Status=Active, price=0.01, Resistance="499 kOhms", series=CRCW-C, Size / Dimension="0.063\" L x 0.031\" W (1.60mm x 0.80mm)", Supplier 1=DigiKey
R11: library part PTN0603Y1003BST1, "PTN0603 10PPM 100K 0.1% S T1 E1", Device Package="0603 (1608 Metric)", manufacturer="Vishay Dale Thin Film", Operating Temperature="-55°C ~ 155°C", Power (Watts)=0.15W, Supplier Device Package=0603, Supplier Part Number 1=764-PTN0603Y1003BST1CT-ND, Temperature Coefficient=±10ppm/°C, Tolerance=±0.1%, componentlink1description=Datasheet, componentlink1url=https://www.vishay.com/docs/60026/ptn.pdf, componentlink2description="DigiKey Link", componentlink2url=https://www.digikey.com/en/products/detail/vishay-dale-thin-film/PTN0603Y1003BST1/12820672, Composition="Thin Film", Features="Anti-Sulfur, Moisture Resistant, Non-Inductive", Height - Seated (Max)="0.020\" (0.51mm)", id=13736, lastupdated=2023-01-02T20:28:06.513, Lifecycle Status=Active, Minimum Order=1, Number of Terminations=2, Package / Case="0603 (1608 Metric)", packaging=TapeAndReel, partid=62258, Part Number=PTN0603Y1003BST1, Part Status=Active, price=0.27, Resistance="100 kOhms", series=PTN, Size / Dimension="0.064\" L x 0.032\" W (1.63mm x 0.81mm)", Supplier 1=DigiKey
R12: library part CRCW060310K0FKEE, "RES SMD 10K OHM 1% 1/10W 0603", Device Package="0603 (1608 Metric)", manufacturer="Vishay Dale", Operating Temperature="-55°C ~ 155°C", Power (Watts)="0.1W, 1/10W", Ratings=AEC-Q200, Supplier Device Package=0603, Supplier Part Number 1=541-CRCW060310K0FKEECT-ND, Temperature Coefficient=±100ppm/°C, Tolerance=±1%, componentlink1description=Datasheet, componentlink1url=https://www.vishay.com/docs/20035/dcrcwe3.pdf, componentlink2description="DigiKey Link", componentlink2url=https://www.digikey.com/en/products/detail/vishay-dale/CRCW060310K0FKEE/5070674, Composition="Thick Film", Features="Automotive AEC-Q200", Height - Seated (Max)="0.020\" (0.50mm)", id=20067, lastupdated=2023-06-29T19:30:21.530, Lifecycle Status=Active, Minimum Order=1, Number of Terminations=2, Package / Case="0603 (1608 Metric)", packaging=CutTape, partid=78260, Part Number=CRCW060310K0FKEE, Part Status=Active, price=0.01, Resistance="10 kOhms", series=CRCW, Size / Dimension="0.063\" L x 0.033\" W (1.60mm x 0.85mm)", Supplier 1=DigiKey
R13: library part PNM0603E5001BST5, "RES SMD 5K OHM 0.1% 0.15W 0603", Device Package="0603 (1608 Metric)", manufacturer="Vishay Thin Film", Operating Temperature="-55°C ~ 155°C", Power (Watts)=0.15W, Supplier Device Package=0603, Supplier Part Number 1=PNM0603-5.0KBCT-ND, Temperature Coefficient=±25ppm/°C, Tolerance=±0.1%, componentlink1description=Datasheet, componentlink1url=http://www.vishay.com/docs/60057/pnm.pdf, componentlink2description="DigiKey Link", componentlink2url=http://digikey.com/product-detail/en/vishay-thin-film/PNM0603E5001BST5/PNM0603-5.0KBCT-ND/2120383, Composition="Thin Film", Features="Anti-Sulfur, Moisture Resistant, Non-Inductive, Non-Magnetic", Height - Seated (Max)="0.020\" (0.51mm)", id=3453, lastupdated=2023-01-02T20:29:57.947, Lifecycle Status=Active, Minimum Order=1, Number of Terminations=2, Package / Case="0603 (1608 Metric)", packaging=TapeAndReel, partid=11960, Part Number=PNM0603E5001BST5, Part Status=Active, price=1.43, Resistance="5 kOhms", series=PNM, Size / Dimension="0.064\" L x 0.032\" W (1.63mm x 0.81mm)", Supplier 1=DigiKey
S1: "7 Pin Mini Slide Switch On-OFF 2Position Micro Slide Toggle Switch 1P2T H=1.5MM Miniature Horizontal Slide Switch SMD", Operating Temperature="-40 to +85degC", Part Number=450405020524, Rated Current=300mA, Rated Voltage=5VDC, Circuit=SPDT, Contact Material="Copper Alloy", Contact Plating=Silver, Mounting Technology=SMT, packaging="Tape and Reel", Published Date="November 2019", Publisher="Wurth Elektronik", Size=8.7x3mm, Switching Function=On-On, Terminal Material="Copper Alloy", Terminal Plating=Silver
S2: "SWITCH TACTILE SPST-NO 0.05A 12V", Contact Rating @ Voltage="0.05A @ 12VDC", Illumination Type, Color=-, manufacturer="Panasonic Electronic Components", Operating Force=220gf, Operating Temperature="-20°C ~ 70°C", Supplier Part Number 1=P16763CT-ND, Actuator Height Off Pcb, Vertical=-, Actuator Length, Right Angle=-, Actuator Orientation="Side Actuated", Actuator Type="Rectangular Button", Circuit=SPST-NO, componentlink1description=Datasheet, componentlink1url=https://api.pim.na.industrial.panasonic.com/file_stream/main/fileversion/245500, componentlink2description="Product Photos", componentlink2url="https://mm.digikey.com/Volume0/opasdata/d220001/medias/images/2518/EVQ-P7A01K, EVQ-P7B01K, EVQ-P7J01K, EVQ-P7K01K.jpg", ComponentLink3Description="Product Training Modules", ComponentLink3URL=https://www.digikey.com/ptm/p/panasonic-electronic-components/tact-switches, ComponentLink4Description="EDA Models", ComponentLink4URL=https://www.snapeda.com/parts/EVQ-P7A01P/Panasonic%20Electronic/view-part/?ref=digikey, ComponentLink5Description="EDA Models", ComponentLink5URL=https://app.ultralibrarian.com/details/61252631-757A-11EC-9033-0A34D6323D74/Panasonic/EVQ-P7A01P?ref=digikey, ComponentLink6Description="360 Product Photos", ComponentLink6URL=https://media.digikey.com/360Images/Panasonic/P16763CT-ND/HTML5Viewer.html, Features=-, id=41, Illumination=Non-Illuminated, Illumination Voltage (Nominal)=-, Ingress Protection=-, lastupdated=2023-10-19T15:20:45.1615887, Lifecycle Status=Active, Minimum Order=1, Mounting Type="Surface Mount, Right Angle", Outline="4.70mm x 2.90mm", packaging="Cut Tape (CT)", Part Number=EVQ-P7A01P, Part Status=Active, price=0.28, series=EVQP7, Supplier 1=DigiKey, Switch Function=Off-Mom, Termination Style="Gull Wing"
U1: "SOT23-6 BATTERY MANAGEMENT ICS R", Battery Pack Voltage=4.24V, Charge Current - Max=500mA, Current - Charging="Constant - Programmable", Device Package=SOT-23-6, manufacturer=UMW, Operating Temperature="-40°C ~ 85°C", Supplier Part Number 1=4518-TP4057CT-ND, Voltage - Supply (Max)=6.5V, Battery Chemistry="Lithium Ion", componentlink1description=Datasheets, componentlink1url=https://mm.digikey.com/Volume0/opasdata/d220001/medias/docus/5010/TP4057.pdf, componentlink2description="Product Photos", componentlink2url=https://mm.digikey.com/Volume0/opasdata/d220001/medias/images/5001/MFG_TP4057.jpg, Fault Protection="Over Temperature", id=56, Interface=USB, lastupdated=2023-10-13T21:42:03.3098964, Lifecycle Status=Active, Minimum Order=1, Mounting Type="Surface Mount", Number Of Cells=1, Package / Case=SOT-23-6, packaging="Cut Tape (CT)", Part Number=TP4057, Part Status=Active, price=0.38, Programmable Features="Current, Timer, Voltage", series=-, Supplier 1=DigiKey, Supplier Device Package=SOT-23-6
U2: "2-in-1 lithium battery protection IC", componentlink1description=Datasheet, componentlink1url=https://pdf1.alldatasheet.com/datasheet-pdf/view/1143778/FUMAN/DW03D.html
U3: "USB to UART Interface"
U4: "IC REG BUCK ADJ 1A SOT563", Current - Output=1A, Device Package="SOT-563, SOT-666", Frequency - Switching=2.4MHz, manufacturer="Texas Instruments", Manufacturer_Part_Number=TPS62A01DRLR, Operating Temperature="-40°C ~ 125°C (TJ)", Supplier Device Package=SOT-563, Supplier Part Number 1=296-TPS62A01ADRLRCT-ND, Voltage - Input (Max)=5.5V, Voltage - Input (Min)=2.5V, Voltage - Output (Min/Fixed)=0.6V, componentlink1description=Datasheets, componentlink1url=https://www.ti.com/lit/ds/symlink/tps62a01.pdf?ts=1651767199227&ref_url=https%253A%252F%252Fwww.ti.com%252Fsitesearch%252Fen-us%252Fdocs%252Funiversalsearch.tsp%253FlangPref%253Den-US%2526searchTerm%253DTPS62A01DRLR%2526nr%253D7, componentlink2description="Product Photos", componentlink2url=https://mm.digikey.com/Volume0/opasdata/d220001/medias/images/4017/MFG_TPS62A01ADRLR.jpg, ComponentLink3Description="Featured Product", ComponentLink3URL=https://www.digikey.com/product-highlight/t/texas-instruments/tps62a0x-series-synchronous-buck-converter, ComponentLink4Description="EDA Models", ComponentLink4URL=https://app.ultralibrarian.com/details/DC372BB8-E59F-11EC-9C51-0A34D6323D74/Texas-Instruments/TPS62A01ADRLR?ref=digikey, Copyright="Copyright (C) 2022 Ultra Librarian. All rights reserved.", Function=Step-Down, id=96, lastupdated=2023-10-13T22:03:50.5779278, Lifecycle Status=Active, Mfr_Name="Texas Instruments", Minimum Order=1, Mounting Type="Surface Mount", Number Of Outputs=1, Output Configuration=Positive, Output Type=Adjustable, Package / Case="SOT-563, SOT-666", packaging="Cut Tape (CT)", Part Number=TPS62A01ADRLR, Part Status=Active, price=0.48, RefDes=RefDes, series=-, Supplier 1=DigiKey, Synchronous Rectifier=Yes, Topology=Buck, Type=DEV, Voltage - Output (Max)=5.5V

## Via types
v1: diameter 0.7, hole 0.35, Top Layer to Bottom Layer, 52 vias

## Nets (pads, with @x,y where several pads share a name; then routed paths per layer and width w, separated by ;. In a path a pad name is that pad's centre, name@x,y a point inside that pad or via, vN(x,y) a via of type N, cw(c..) or ccw(c..) an arc to the next point about the centre after c; other vN are vias at no path point)
3.3V: 3.3V.2 C5.2 C6.2 C7.2 L1.2 R8.2 S2.3 | length 71.3
  Top Layer w0.3: v1(18.362,2.26) S2.3
  Top Layer w0.5: C6.2 6.1,30.65 6.45,31 L1.2 6.155,31.809 C7.2 ; C7.2@6.237,34.687 6.25,34.7 6.25,36 8.5,38.25 8.6,38.15 8.6,37.434 8.892,37.141 10.168,37.141 10.263,37.047 11.538,37.047 11.545,37.053 13.759,37.053 14.105,36.707 14.105,36.338 ; R8.2 13.85,35.714 14.105,35.969 14.105,36.338 ; C5.2 R8.2@13.878,34.7 ; v1(16.25,36.25) 16.162,36.338 14.105,36.338
  Bottom Layer w0.3: v1(16.25,36.25) 19.45,36.25 21.874,33.826 21.874,14.626 25.528,10.972 25.528,5.028 22.75,2.25 18.372,2.25 v1(18.362,2.26)
+5: C1.2 D1.1 J3.1 LED1.4 U1.4 VCC.TP? | length 53.8
  Top Layer w0.3: VCC.TP? 11,5.542 11.176,5.366 11.684,5.366 12.2,4.85 J3.1 ; 17.2,10.208 17.2,8.9 18.362,7.738 19.46,7.738 19.87,7.328 19.87,5.542 20.045,5.366 22.641,5.366 23.25,5.975 LED1.4
  Top Layer w0.5: VCC.TP? 11,8.395 10.465,8.93 10.465,9.915 10.758,10.208 17.2,10.208 17.774,10.208 18.253,10.687 v1(18.253,11.987) ; U1.4 C1.2@19.46,23.025 ; D1.1@18,32.16 v1(20,32.16) ; C1.2@19.41,22.45 C1.2 C1.2@19.46,23.025 ; v1(20,24.25) 20,24.196 19.46,23.656 C1.2@19.46,23.025
  Bottom Layer w0.5: v1(18.253,11.987) 18.253,12.503 19.5,13.75 19.5,23.957 19.793,24.25 v1(20,24.25) v1(20,32.16)
BAT+: BAT+.1 R3.2 R10.1 R11.2 S1.1 U1.3 U4.4 | length 70.5
  Top Layer w0.25: v1(10.708,28.085) 10.757,28.085 11.511,28.839 11.511,28.853 12.058,29.4 R10.1 12.058,29.95 12.388,30.28 12.388,31.635 12.155,31.635 12.13,31.66 U4.4 ; R10.1@11.945,29.45 R10.1@11.945,29.5
  Top Layer w0.3: v1(10.708,28.085) 10.708,26.688 13.12,24.275 v1(18.253,24.275) ; R10.1@11.945,29.4 R10.1@11.945,29.45
  Top Layer w0.5: BAT+.1 2,11.475 1.75,11.225 1.75,8.762 2.988,8.762 v1(3,8.75) 2.962,8.712 2.962,8.049 2.55,7.638 S1.1 ; U1.3 17.2,20.075 17.752,19.523 17.752,19.081 v1(17.79,19.043) ; v1(18.253,24.275) 19.031,25.053 20.932,25.053 20.985,25 22.25,25 ; R3.2 21.8,30.65 23,29.45 23,25.75 22.25,25 ; R11.2 22.25,25
  Bottom Layer w0.5: v1(3,8.75) 4.402,8.75 5.402,9.75 6.75,9.75 7.75,10.75 7.75,14.5 4.75,17.5 4.75,22.127 v1(10.708,28.085) ; v1(17.79,19.043) 18.253,19.506 v1(18.253,24.275)
BAT_SW+: C8.2 S1.2 U4.3 | length 45
  Top Layer w0.25: v1@10.465,30.785 U4.3@10.465,31.657
  Top Layer w0.3: v1@10.465,30.785 v1(10.5,30.75) ; v1(11.545,33.51) 11.545,33.6 11.84,33.895 11.84,34.94 C8.2 ; C8.2@11.545,34.645 C8.2@11.6,34.7
  Top Layer w0.5: S1.2 5.45,7.815 5.712,8.077 5.712,8.712 v1(5.75,8.75) ; C8.2@11.6,34.7 11.84,34.94 11.858,34.958 11.858,36.25 v1(13.25,36.25)
  Bottom Layer w0.3: v1(10.5,30.75) 10.5,30.785 11.545,31.83 v1(11.545,33.51)
  Bottom Layer w0.5: v1(5.75,8.75) 7,8.75 10,11.75 10,14.886 8.5,16.386 8.5,24.183 13.798,29.481 13.798,35.702 v1(13.25,36.25)
CH_3.3V: C3.2 C9.2 C10.2 IC1.3 U3.4 U3.16 | length 24.9
  Top Layer w0.3: IC1.3 8.25,20.95 8.925,20.275 11.739,20.275 11.939,20.075 C10.2 12.724,19.648 13.25,19.122 v1(13.25,19.043) 13.017,19.043 12.835,18.861 U3.4 ; v1(15,14.5) 15,14.35 15.445,13.905 16.645,13.905
  Top Layer w0.5: IC1.3 8.25,24.475 8.45,24.675 C3.2 ; U3.16 16.645,13.905 16.99,14.25 18.287,14.25 18.362,14.325 C9.2
  Bottom Layer w0.3: v1(13.25,19.043) 13.25,16.25 v1(15,14.5)
CHARGE: R2.1 U1.1 | length 11.1
  Top Layer w0.3: v1(14.75,19.043) 15.3,19.593 U1.1 ; v1@17.774,13.25 18.655,13.25 19.918,11.987 R2.1
  Bottom Layer w0.3: v1(14.75,19.043) 14.75,16 v1@17.5,13.25
  other v1: 17.752,13.25
D+: D+.TP? J3.3 U3.5 | length 18.8
  Top Layer w0.25: J3.3 13.5,5.1 D+.TP?
  Top Layer w0.3: v1(11.497,19.523) 11.565,19.455 U3.5 ; v1(13.876,8.75) 14.7,7.926 D+.TP?
  Bottom Layer w0.3: v1(11.497,19.523) 11.497,17.253 13.876,14.874 v1(13.876,8.75)
D-: D-.TP? J3.2 U3.6 | length 18
  Top Layer w0.25: D-.TP? 12.835,5.869 12.85,5.854 J3.2
  Top Layer w0.3: U3.6 10.295,19.142 10.568,19.415 v1(10.568,19.523) ; v1(11.9,8.75) 12.835,7.815 D-.TP?
  Bottom Layer w0.3: v1(10.568,19.523) 10.568,16.552 11.9,15.22 v1(11.9,8.75)
GND: BAT-.1 C1.1 C2.1 C3.1 C4.1 C9.1 C10.1 GND.TP? IC1.1 J3.5 J3.S LED1.1 P1.2 R1.1 R12.1 R13.1 S1.4 U1.2 U2.3 U3.1 | length 61.2
  Top Layer w0.3: IC1.1 5.25,20.138 5.865,19.523 v1(9.512,19.523) ; 10.708,22.75 10.75,22.708 C2.1 ; R1.1@13.25,21.325 13.29,21.285 R1.1 13.29,20.71 13.604,20.396 C10.1 14.243,20.075 14.443,20.275 14.443,21.179 14.589,21.325 15.725,21.325 16.25,20.8 U1.2 ; U2.3 16.665,26.425 16.99,26.75 16.99,26.94 17,26.95 v1(17,27.75)
  Top Layer w0.5: IC1.1 5.25,22.075 4.75,22.575 4.75,25.7 5.55,26.5 C3.1 ; J3.S@10.2,1.7 12.3,1.7 14.7,1.7 J3.S@16.8,1.7 ; J3.S@10.2,4.05 J3.S@10.3,4.15 ; U1.2 16.25,18.87 16.645,18.475 U3.1 ; C4.1 16.99,28.895 17,28.885 v1(17,27.75) ; v1(20.75,33.25) 24.16,33.25 P1.2@25.25,32.16
  Bottom Layer w0.3: v1(9.512,19.523) 9.512,21.555 10.708,22.75
  Bottom Layer w0.5: v1(17.79,16.92) 16.987,17.723 16.987,27.737 v1(17,27.75) 17,30.296 19.954,33.25 v1(20.75,33.25)
  other v1: 2.192,1.573 6.184,1.573 3.922,6.077 8.789,6.077 24.498,8.543 20.75,17.446 16.25,19.08 4.75,24.725 6.016,28.666 23.2,32.987 22.75,35.317 13.25,38.273
IO_0: D4.1 P2.3 R4.2 R13.2 S2.2 | length 49.9
  Top Layer w0.3: v1(6.75,12.208) 6.75,7.91 7.022,7.638 D4.1 8.55,7.638 8.662,7.75 v1(9.5,7.75) v1@9.512,7.738 ; R13.2 18.655,4.142 18.362,3.848 v1(18.362,3.74) S2.2 ; v1(21.75,8.75) 22,9 R4.2
  Bottom Layer w0.3: P2.3@1.75,29.62 3.75,27.62 3.75,17.12 6.75,14.12 v1(6.75,12.208) ; v1(9.5,7.75) 17.5,7.75 ; v1(18.362,3.74) 18.23,3.872 18.23,7.353 17.833,7.75 17.646,7.75 17.646,8.75 v1(21.75,8.75)
NetC4_2: C4.2 R3.1 U2.7 | length 6.2
  Top Layer w0.3: C4.2 18.59,27.378 18.888,27.08 19.87,27.08 19.875,27.075 U2.7
  Top Layer w0.5: C4.2 C4.2@18.888,29.62 ; C4.2@19.158,29.35 R3.1
NetC5_1: C5.1 R7.2 R8.1 U4.5 | length 9.5
  Top Layer w0.25: U4.5 12.55,32.16 12.841,31.869 12.841,30.75 C5.1 15.352,30.75 15.352,31.455 15.296,31.51 ; R8.1 15.15,31.656 15.296,31.51 ; R7.2 15.296,31.51
NetD1_2: 5V.2 D1.2 | length 4
  Top Layer w0.5: 5V.2@17.79,38.25 17.79,36.179 18,35.969 D1.2
NetD3_2: D3.2 U3.14 | length 12.4
  Top Layer w0.3: D3.2 5.25,13.95 5.8,14.5 13.93,14.5 14.105,14.325 U3.14
NetD4_2: D4.2 U3.13 | length 6.5
  Top Layer w0.3: D4.2 8.942,9.862 10.079,11 12.5,11 12.835,11.335 U3.13
NetL1_1: L1.1 U4.2 | length 1.4
  Top Layer w0.25: L1.1@9.25,31.685 9.725,32.16 U4.2
NetLED1_2: LED1.2 R4.1 | length 7.4
  Top Layer w0.3: LED1.2 23.25,7.525 v1(23.25,9.25)
  Top Layer w0.5: R4.1 v1(22,13)
  Bottom Layer w0.3: v1(22,13) 22,10.5 v1(23.25,9.25)
NetLED1_3: LED1.3 R2.2 | length 5.7
  Top Layer w0.3: R2.2 19.968,9.865 20.461,9.372 20.461,6.537 20.673,6.325 LED1.3
NetP1_6: P1.6 R11.1 R12.2 TP10.TP? | length 10.4
  Top Layer w0.5: TP10.TP? 23.332,17.725 23.332,21.857 23.475,22 ; R12.2 R11.1 22.75,22.45 23.2,22 23.475,22 ; P1.6@25.25,22 P1.6 23.475,22
NetR1_2: R1.2 U1.6 | length 2.1
  Top Layer w0.5: R1.2 13.851,22.725 14.15,23.025 U1.6
NetR5_1: R5.1 U3.3 | length 9.7
  Top Layer w0.3: R5.1 13.959,16.25 14.105,16.396 U3.3
NetR6_1: R6.1 U3.2 | length 14.5
  Top Layer w0.3: R6.1 5.825,18.404 5.96,18.539 v1(5.96,18.75) ; v1(8.25,15.5) 15.075,15.5 15.375,15.8 U3.2
  Bottom Layer w0.3: v1(5.96,18.75) 5.96,17.79 v1(8.25,15.5)
NetR9_2: R9.2 U2.1 | length 2.4
  Top Layer w0.3: R9.2 U2.1
NetR10_2: R10.2 U4.6 | length 6.3
  Top Layer w0.25: R10.2 11.116,29.808 11.116,30.32 11.497,30.7 11.497,30.75 v1(11.668,30.75) ; U4.6 12.543,32.66 v1(12.543,33.467)
  Bottom Layer w0.3: v1(11.668,30.75) 11.668,30.873 12.543,31.748 v1(12.543,33.467)
NetU2_2: U2.2 U2.4 | length 3.6
  Top Layer w0.3: U2.4 13.975,25.775 13.5,26.25 13.5,26.899 13.676,27.075 U2.2
NetU2_5: U2.5 U2.8 | length 4.5
  Top Layer w0.3: U2.5 21.874,25.775 22.05,25.951 22.05,27.538 21.863,27.725 U2.8
OUT-: C6.1 C7.1 C8.1 P2.4 R7.1 R9.1 U2.6 U4.1 | length 53
  Top Layer w0.25: C8.1@10.295,34.405 10.465,34.235 U4.1